# Altium PCB landslide_node.PcbDoc
Units mm, origin at the board's own origin, x right, y up, seen from the top; angles counter-clockwise.
Board outline 91.4 x 86.1 mm, 2 copper layers (Top Layer, Bottom Layer); 58 components, 38 nets, 192 pads, 49 vias.
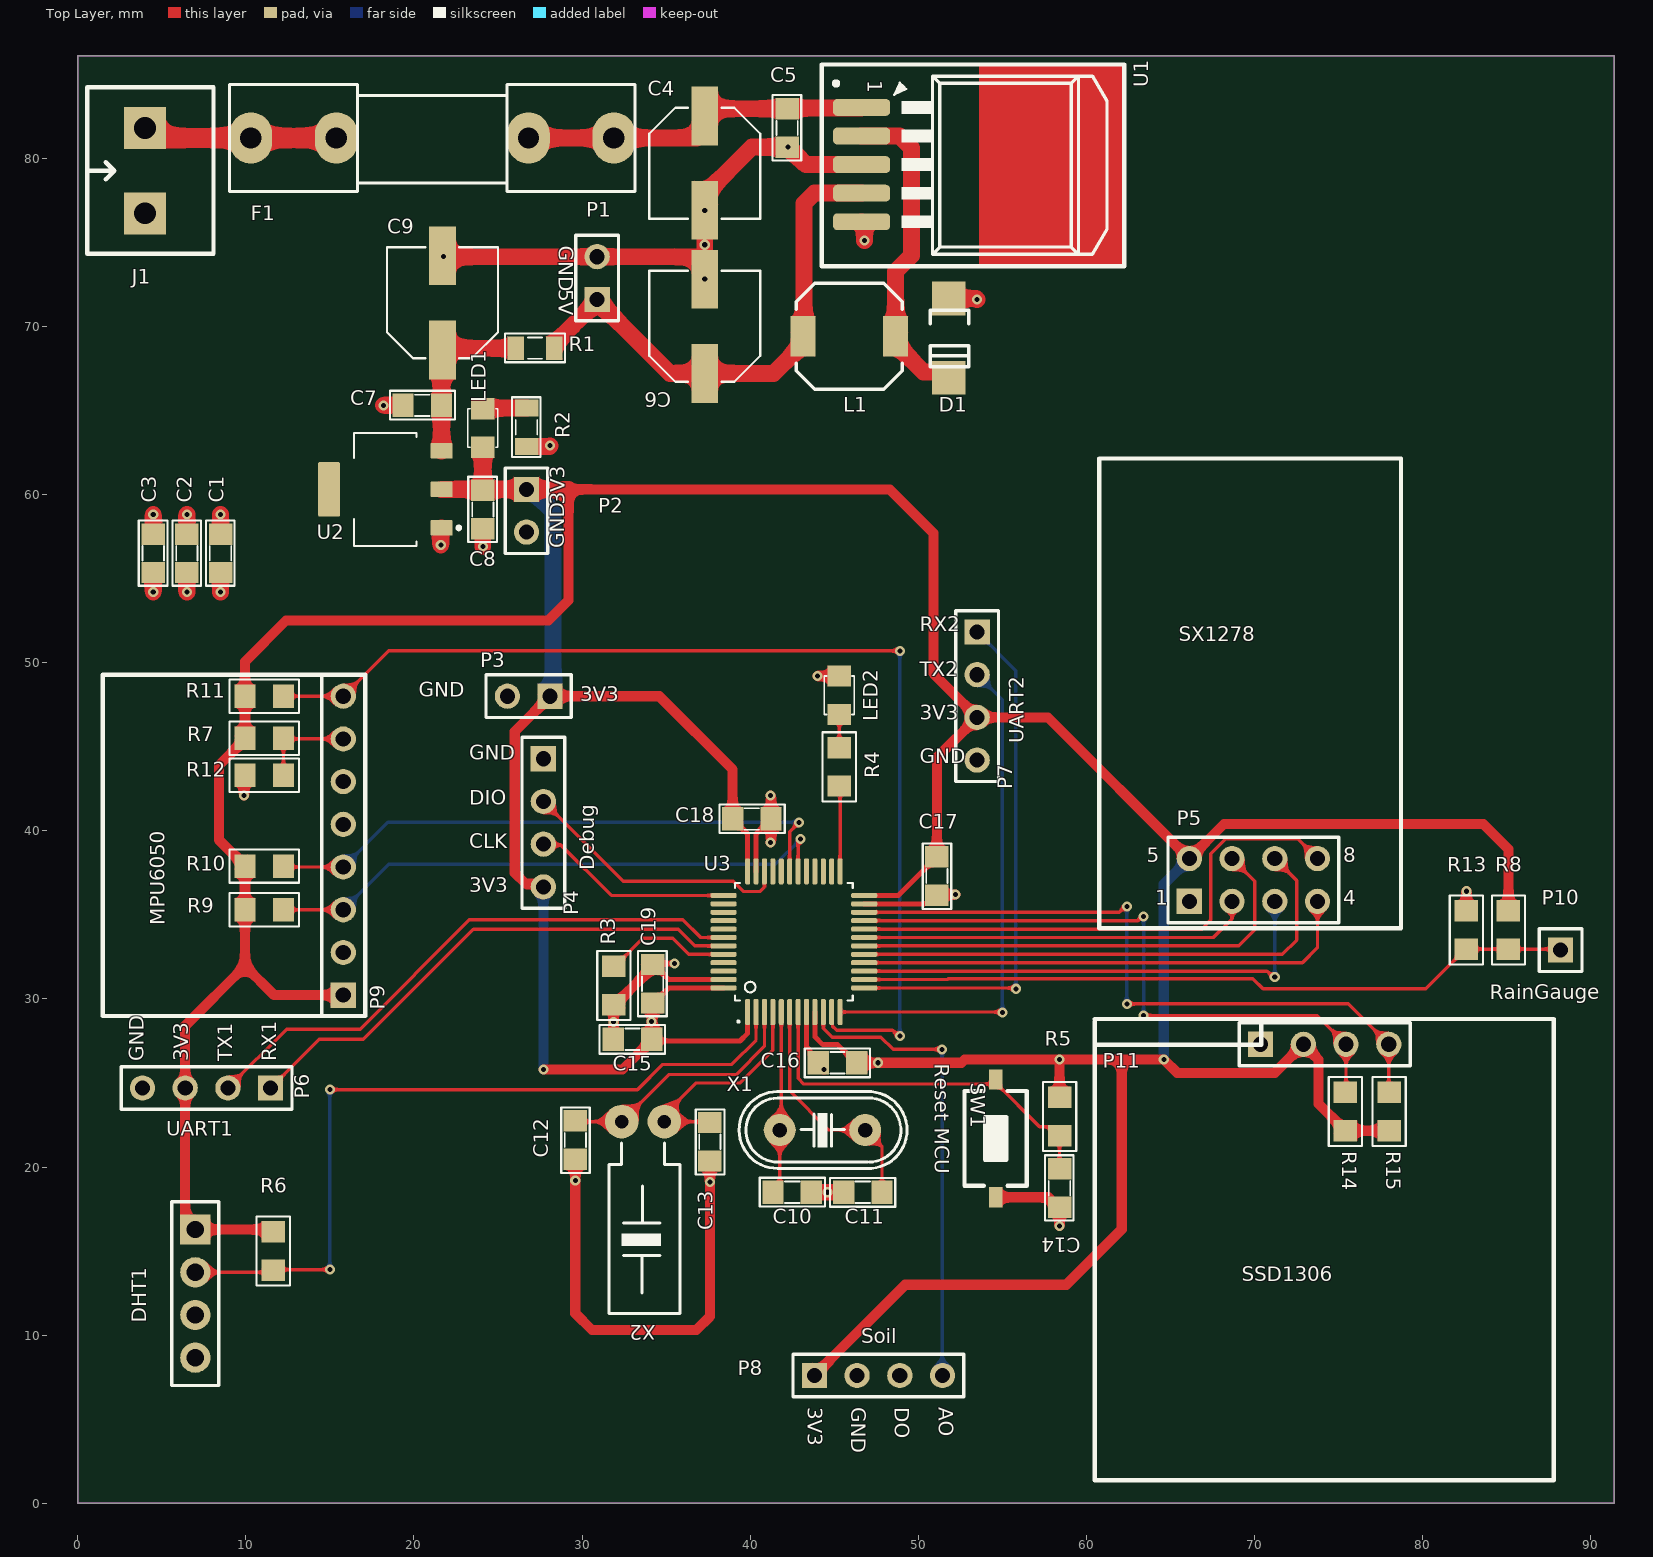
[diagram p0: Top Layer view]
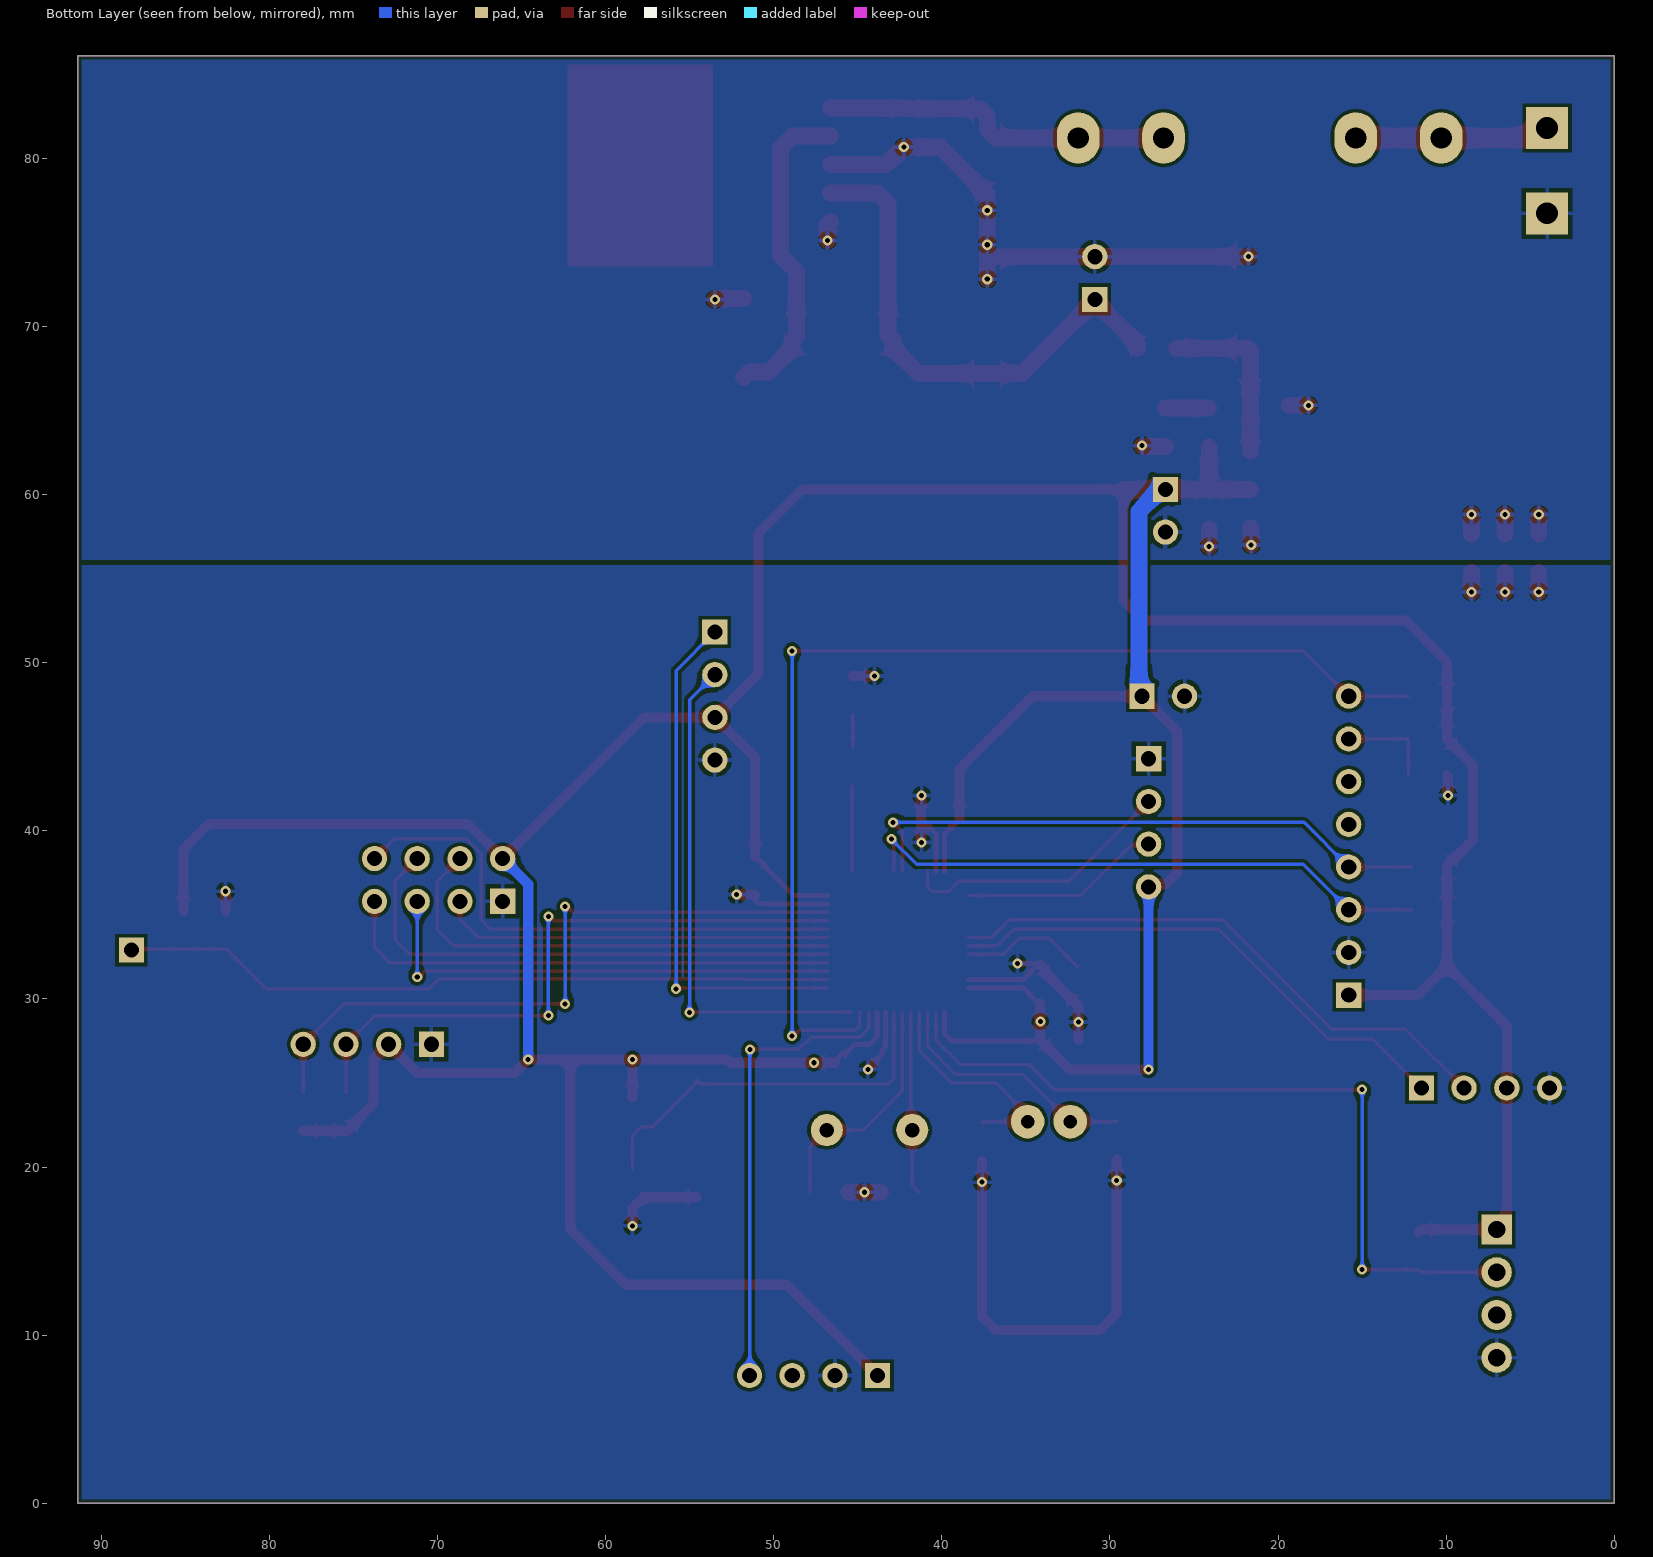
[diagram p1: Bottom Layer view, seen from below]
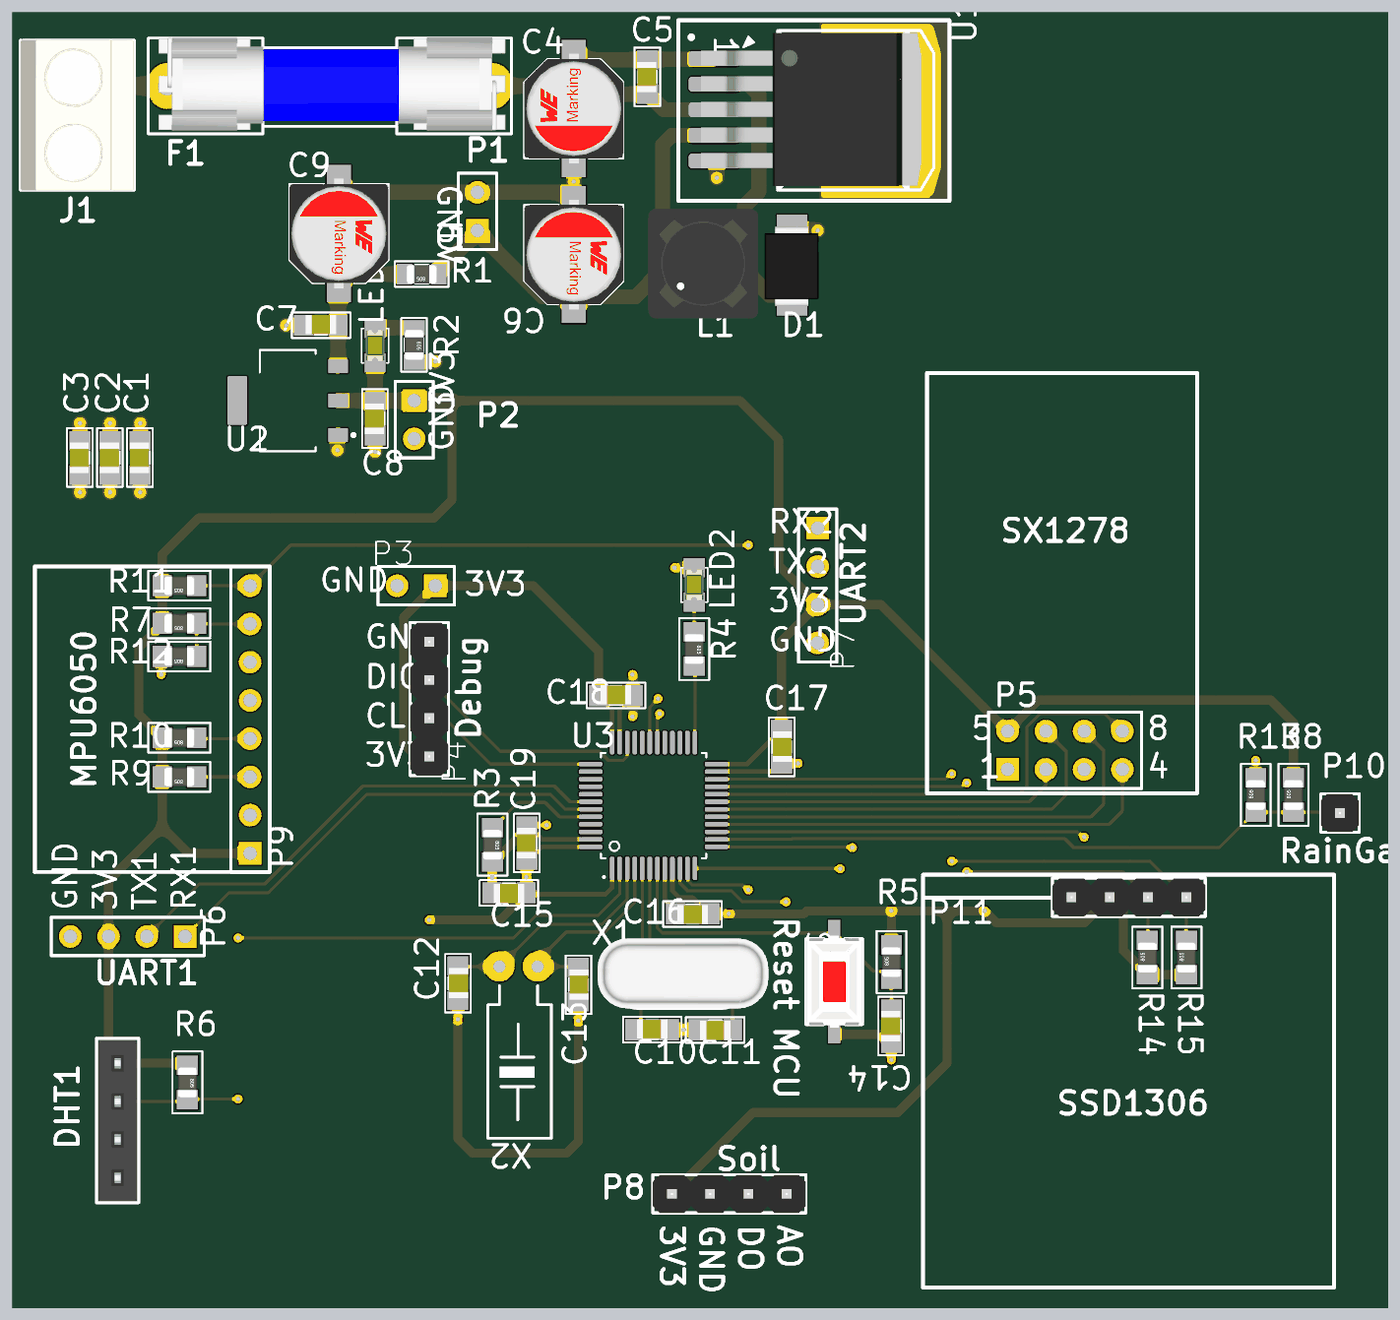
[diagram p2: 3D render of the assembled board from above, using the file's embedded part models]

## Layer stack, top to bottom
Top Solder: solder mask 0.0102, Solder Resist, Dk 3.5
Top Layer: signal copper 0.0356
Dielectric 1: dielectric 0.32, FR-4, Dk 4.8
Bottom Layer: signal copper 0.0356
Bottom Solder: solder mask 0.0102, Solder Resist, Dk 3.5

## Board outline
0,0 0,86.1 91.4,86.1 91.4,0

## Design rules (kind name [scope] priority, off if disabled: settings)
AssemblyTestPointUsage [All] p1 off:
AssemblyTestpoint [All] p1 off: testpointundercomponent=TRUE minsize=1.016 maxsize=2.54 preferedsize=1.524 minholesize=0 maxholesize=1.016 preferedholesize=0.813 testpointgrid=0.025 usegrid=TRUE gridtolerance=0 allowsidetop=TRUE allowsidebottom=TRUE
Clearance [All] p1: gap=0.2 ignorepadtopadclearanceinfootprint=FALSE except(0: Arc-Hole Track-Hole SMDPad-Hole THPad-Hole Via-Hole Fill-Hole Poly-Hole Region-Hole Text-Hole; 0.3: Fill-Fill Fill-Poly Fill-Region Poly-Poly Poly-Region Region-Region)
FabricationTestPointUsage [All] p1 off: valid=0 allowmultiple=FALSE
FabricationTestpoint [All] p1 off: side=3 testpointundercomponent=TRUE minsize=1.016 maxsize=2.54 preferedsize=1.524 minholesize=0 maxholesize=1.016 preferedholesize=0.813 testpointgrid=0.025 allowsidetop=TRUE allowsidebottom=TRUE usegrid=TRUE gridtolerance=0
MinimumSolderMaskSliver [All] p1: minsoldermaskwidth=0
PolygonConnect [All] p1: connectstyle=Relief reliefconductorwidth=0.254 reliefentries=4 polygonreliefangle="90 Angle" airgapwidth=0.254
RoutingVias [All] p1: holewidth=0.3 width=0.6 viastyle="Through Hole" minholewidth=0.3 minwidth=0.6 maxholewidth=0.3 maxwidth=0.6
SilkToSilkClearance [All] p1: silktosilkclearance=0
SilkToSolderMaskClearance [IsPad] p1: minsilkscreentomaskgap=0 clearancetoexposedcopper=TRUE
SolderMaskExpansion [All] p1: expansion=0.102 istentingtop=FALSE
Width [All] p1: maxlimit=3 minlimit=0.2 preferedwidth=0.3
23 further rules are at their usual default settings.

## Classes and differential pairs
net class POWER: +3V3 +5 GND GND_MCU NetC7_1 NetD1_2 NetF1_1 Vin
component class power_node: C1 C2 C3 C4 C5 C6 C7 C8 C9 D1 F1 J1 L1 LED1 P1 P2 R1 R2 U1 U2
component class mcu_node: C10 C11 C12 C13 C14 C15 C16 C17 C18 C19 DHT1 LED2 P3 P4 P5 P6 P7 P8 P9 P10 P11 R3 R4 R5 R6 R7 R8 R9 R10 R11 R12 R13 R14 R15 SW1 U3 X1 X2

## Components (designator, comment, footprint, x,y, rotation, side; value= is the part's Value field where it differs from the comment)
C1 "104" SM-0805 8.5,56.5 r270 top value=103
C2 "104" SM-0805 6.5,56.5 r270 top value=103
C3 "104" SM-0805 4.5,56.5 r270 top value=103
C4 "100uH/25V" CAP-ALU-SMD-6.3x7.7x2.2 37.3,79.7 r270 top
C5 "104" SM-0805 42.2,81.8 r270 top value=103
C6 "470uf/16V" CAP-ALU-SMD-6.3x7.7x2.2 37.3,70 r90 top
C7 "103" SM-0805 20.5,65.3 r180 top
C8 "103" SM-0805 24.1,59.1 r270 top
C9 "100uH/16V" CAP-ALU-SMD-6.3x7.7x2.2 21.7,71.4 r90 top
C10 "22pF" SM-0805 42.5,18.5 r180 top value=103
C11 "22pF" SM-0805 46.7,18.5 r0 top value=103
C12 "22pF" SM-0805 29.6,21.6 r90 top value=103
C13 "22pF" SM-0805 37.6,21.5 r90 top value=103
C14 "104" SM-0805 58.4,18.743 r270 top value=103
C15 "104" SM-0805 33,27.6 r0 top value=103
C16 "104" SM-0805 45.2,26.2 r0 top value=103
C17 "475" SM-0805 51.1,37.3 r90 top value=103
C18 "103" SM-0805 40.1,40.7 r180 top
C19 "105" SM-0805 34.2,30.9 r270 top value=103
D1 "1N5822" Diode_SS34 51.8,69.3 r270 top
DHT1 "DHT22" DHT22 7,12.47 r270 top
F1 "F2A" FUSE2 21.1,81.2 r0 top value=Fuse
J1 "KF2" KF2-5.08 4,79.26 r90 top
L1 "Inductor" inductor_smd 45.9,69.4 r180 top value=100uH
LED1 "LED" LED-0805-Green 24.1,62.814 r90 top value="LED 3 - 5 ly 2 Colour"
LED2 "LED" LED-0805-Green 45.3,46.914 r90 top value="LED 3 - 5 ly 2 Colour"
P1 "Header 2" HDR1X2 30.9,71.6 r90 top
P2 "Header 2" HDR1X2 26.7,60.3 r270 top
P3 "Header 2" HDR1X2 28.1,48 r180 top
P4 "Header 4" "HDR 1X4" 27.7,44.28 r270 top
P5 "LORA_SX1278" HDR2X4_CEN 66.12,35.8 r0 top
P6 "Header 4" HDR1X4 11.48,24.7 r180 top
P7 "Header 4" HDR1X4 53.5,51.82 r270 top
P8 "soil_moisture_ss" "HDR 1X4" 43.82,7.6 r0 top
P9 "Header 8" HDR1X8 15.8,30.22 r90 top
P10 "RainGauge_ss" "HDR 1X1" 88.2,32.9 r180 top
P11 "SSD1306" "HDR 1X4" 70.36,27.3 r0 top
R1 "0R" RES-SMD-0805 27.2,68.7 r180 top
R2 "100R" RES-SMD-0805 26.7,64 r270 top
R3 "4k7" R-0805 31.9,30.8 r270 top value=1k
R4 "47R" R-0805 45.3,43.8 r270 top value=1k
R5 "4k7" R-0805 58.4,23 r90 top value=1k
R6 "4k7" R-0805 11.639,15.004 r270 top value=1k
R7 "4k7" R-0805 11.1,45.5 r180 top value=1k
R8 "4k7" R-0805 85.1,34.1 r90 top value=1k
R9 "4k7" R-0805 11.1,35.3 r180 top value=1k
R10 "4k7" R-0805 11.1,37.9 r180 top value=1k
R11 "4k7" R-0805 11.1,48 r180 top value=1k
R12 "4k7" R-0805 11.1,43.3 r180 top value=1k
R13 "4k7" R-0805 82.6,34.1 r90 top value=1k
R14 "4k7" R-0805 75.4,23.3 r90 top value=1k
R15 "4k7" R-0805 78,23.3 r90 top value=1k
SW1 "SW" SW1-SMD 54.6,21.7 r270 top value="SW chip 2 pin"
U1 "LM2576" TO263 52.6,80 r270 top
U2 "AMS1117-3.3" SOT229P700X180-4N 18.3,60.3 r90 top
U3 "STM32F030CCT6" QFP50P900X900X160-48N 42.6,33.4 r90 top
X1 "8Mhz" XT2 44.3,22.2 r180 top value=4Mhz
X2 "32,768 Khz" XT32k 34.9,22.7 r270 top value=32,768khz

## Footprints (in the part's own frame and the unit in brackets; to place one, negate y for a bottom-side part, rotate by r counter-clockwise, add the part's x,y. Pads: shape width x height; smd on the part's side, far side on the other; paste and mask are expansions set on the pad)
CAP-ALU-SMD-6.3x7.7x2.2 [mm]
  rect 3.5x1.6 smd: 1(-2.8,0) 2(2.8,0)
  silkscreen extent -3.3,-3.3 3.3,3.3, body extent -3.65,-3.3 3.65,3.3, height 7.65
DHT22 [mm]
  rect 1.8x1.8 hole 1.02: 1(-3.81,0)
  round 1.8 hole 1.02: 2(-1.27,0) 3(1.27,0) 4(3.81,0)
  silkscreen extent -5.46,-1.4 5.46,1.4, body extent -7.86,-5.84 7.61,2.31, height 35.57
Diode_SS34 [mm]
  rect 2x2 smd: 1(-2.35,0) 2(2.35,0)
  silkscreen extent -1.65,-1.1 1.7,1.2, body extent -2.57,-1.82 2.73,1.78, height 2.4
FUSE2 [mil] "De Fuse"
  oval 100x120 hole 50: 1(-425,0) 1(-225,0) 2(225,0) 2(425,0)
  silkscreen extent -475,-125 475,125, body extent -448,-117 459,127, height 378
HDR1X2 [mm] "Connector; Header; 2 Position"
  rect 1.5x1.5 hole 0.9: 1(0,0)
  round 1.5 hole 0.9: 2(2.54,0)
  silkscreen extent -1.27,-1.27 3.81,1.27, body extent -1.27,-1.27 3.81,1.27, height 7
HDR1X4 [mm] "Connector; Header; 4 Position"
  rect 1.5x1.5 hole 0.9: 1(0,0)
  round 1.5 hole 0.9: 2(2.54,0) 3(5.08,0) 4(7.62,0)
  silkscreen extent -1.27,-1.27 8.89,1.27, body extent -1.27,-1.27 8.89,1.27, height 7
HDR1X8 [mm] "Connector; Header; 8 Position"
  rect 1.5x1.5 hole 0.9: 1(0,0)
  round 1.5 hole 0.9: 2(2.54,0) 3(5.08,0) 4(7.62,0) 5(10.16,0) 6(12.7,0) 7(15.24,0) 8(17.78,0)
  silkscreen extent -1.27,-1.27 19.05,1.27, body extent -1.27,-1.27 19.05,1.27, height 7
HDR2X4_CEN [mm] "Connector; Header; 4x2 Position"
  rect 1.5x1.5 hole 0.9: 1(0,0)
  round 1.5 hole 0.9: 2(2.54,0) 3(5.08,0) 4(7.62,0) 5(0,2.54) 6(2.54,2.54) 7(5.08,2.54) 8(7.62,2.54)
  silkscreen extent -1.27,-1.27 8.89,3.81, body extent -1.27,-1.27 8.89,3.81, height 7
"HDR 1X1" [mm] "Generic Antenna; 1 Lead"
  rect 1.5x1.5 hole 0.9: 1(0,0)
  silkscreen extent -1.27,-1.27 1.27,1.27, body extent -1.26,-1.27 1.27,1.26, height 8.51
"HDR 1X4" [mm] "Connector; Header; 4 Position"
  rect 1.5x1.5 hole 0.9: 1(0,0)
  round 1.5 hole 0.9: 2(2.54,0) 3(5.08,0) 4(7.62,0)
  silkscreen extent -1.27,-1.27 8.89,1.27, body extent -1.26,-1.27 8.89,1.26, height 8.51
inductor_smd [mm] "SM Inductor; 2 Leads; Body 6.3x6.3mm (LxW)"
  rect 1.5x2.4 smd: 1(-2.75,0) 2(2.75,0)
  silkscreen extent -3.15,-3.15 3.15,3.15, body extent -3.65,-3.65 3.65,3.65, height 4
KF2-5.08 [mm]
  rect 2.5x2.5 hole 1.3: 1(-2.54,0) 2(2.54,0)
  silkscreen extent -4.95,-4.08 4.95,3.43, body extent -5,-4.07 5,3.43, height 10
LED-0805-Green [mil]
  rect 50x55 smd: 1(0,0) 2(90,0)
  silkscreen extent 0,-35 90,35, body extent 5,-25 85,25, height 43
QFP50P900X900X160-48N [mm]
  rrect70% 1.56x0.3 smd: 1(-4.18,2.75) 2(-4.18,2.25) 3(-4.18,1.75) 4(-4.18,1.25) 5(-4.18,0.75) 6(-4.18,0.25) 7(-4.18,-0.25) 8(-4.18,-0.75) 9(-4.18,-1.25) 10(-4.18,-1.75) 11(-4.18,-2.25) 12(-4.18,-2.75) 25(4.18,-2.75) 26(4.18,-2.25) 27(4.18,-1.75) 28(4.18,-1.25) 29(4.18,-0.75) 30(4.18,-0.25) 31(4.18,0.25) 32(4.18,0.75) 33(4.18,1.25) 34(4.18,1.75) 35(4.18,2.25) 36(4.18,2.75)
  rrect70% 0.3x1.56 smd: 13(-2.75,-4.18) 14(-2.25,-4.18) 15(-1.75,-4.18) 16(-1.25,-4.18) 17(-0.75,-4.18) 18(-0.25,-4.18) 19(0.25,-4.18) 20(0.75,-4.18) 21(1.25,-4.18) 22(1.75,-4.18) 23(2.25,-4.18) 24(2.75,-4.18) 37(2.75,4.18) 38(2.25,4.18) 39(1.75,4.18) 40(1.25,4.18) 41(0.75,4.18) 42(0.25,4.18) 43(-0.25,4.18) 44(-0.75,4.18) 45(-1.25,4.18) 46(-1.75,4.18) 47(-2.25,4.18) 48(-2.75,4.18)
  silkscreen extent -4.81,-3.5 3.5,3.5
R-0805 [mil] "Compoment SMD 80x50mil"
  rect 50x55 smd: 1(-45,0) 2(45,0)
  silkscreen extent -81,-39 81,39, body extent -39,-25 39,25, height 31
RES-SMD-0805 [mil]
  rect 39.37x55 smd: 1(-45,0) 2(45,0)
  silkscreen extent -70,-34 70,33, body extent -39,-25 39,25, height 31
SM-0805 [mil] "Compoment SMD 80x50mil"
  rect 50x55 smd: 1(-45,0) 2(45,0)
  silkscreen extent -77,-34 76,33, body extent -40,-27 40,23, height 24
SOT229P700X180-4N [mm]
  rrect15% 0.93x1.31 smd: 1(-2.29,-3.345) 2(0,-3.345) 3(2.29,-3.345)
  rrect15% 3.24x1.31 smd: 4(0,3.345)
  silkscreen extent -3.36,-4.47 3.36,1.86
SW1-SMD [mm]
  rect 1.2x0.8 smd: 1(-3.5,0) 2(3.5,0)
  silkscreen extent -2.82,-1.85 2.82,1.85, body extent -3.05,-1.85 3.05,1.85, height 2.5
TO263 [mm]
  rrect50% 1x3.4 smd: 1(-3.019,-5.969) 2(-1.319,-5.969) 4(2.081,-5.969) 5(3.781,-5.969)
  rrect50% 1x3.4 smd mask+0: 3(0.381,-5.969)
  Top Layer region: -5.568,1.016 6.432,1.016 6.432,9.65 -5.568,9.65
  silkscreen extent -5.57,-8.35 6.43,9.65, body extent -4.73,-6.84 5.43,7.8, height 4.57
XT2 [mil] "Footpin for Crystal 2 pin"
  round 75 hole 34: 1(-100,0) 2(100,0)
  silkscreen extent -198,-90 195,90, body extent -233,-93 213,90, height 138
XT32k [mm] "Crystal 32k, 2 pin, real timer for DS1307"
  round 2 hole 0.813: 1(0,0) 2(0,-2.54)
  silkscreen extent 1.27,-3.3 11.4,0.91

## Part data
C1 C2 C3 C5 C7 C8 C10 C11 C12 C13 C14 C15 C16 C17 C18 C19: library part CM, "Cap SMD"
C4 C6 C9: library part CN-ALU-SMD, "Polarized Capacitor (Axial)", LatestRevisionDate=17-Jul-2002, LatestRevisionNote="Re-released for DXP Platform.", PackageReference=POLAR0.8, Published=8-Jun-2000, Publisher="Altium Limited"
D1: library part 1N5819, "Schottky diode"
DHT1: Manufacturer="W¨¹rth Elektronik eiSos GmbH", partNo=613004143121, ComponentLink1 Description=Manufacturer, ComponentLink1URL=http://www.we-online.com, ComponentLink2 Description=Datasheet, ComponentLink2URL=http://katalog.we-online.de/em/datasheet/6130xx143121.pdf, Created by="Karrer Zheng", Created Date="29 March 2013", NoPins=04
F1: library part Fuse, "Fuse", Designed by=VanDungEvn
J1: Manufacturer="Würth Elektronik eiSos GmbH", partNo=691103110002, ComponentLink1 Description=Manufacturer, ComponentLink1URL=http://www.we-online.com, ComponentLink2 Description=Datasheet, ComponentLink2URL=http://katalog.we-online.de/em/datasheet/6911031100xx.pdf, Created by="Karrer Zheng", Created Date="29 October 2013", NoPins=2
LED1 LED2: library part "LED SMD"
P1 P2 P3: "Header, 2-Pin", LatestRevisionDate=17-Jul-2002, LatestRevisionNote="Re-released for DXP Platform.", Publisher="Altium Limited"
P4 P6 P7: "Header, 4-Pin"
  P6 P7: LatestRevisionDate=17-Jul-2002, LatestRevisionNote="Re-released for DXP Platform.", Publisher="Altium Limited"
P5: library part "Header 4X2A", "Header, 4-Pin, Dual row", LatestRevisionDate=17-Jul-2002, LatestRevisionNote="Re-released for DXP Platform.", Publisher="Altium Limited"
P8 P11: library part "Header 4", "Header, 4-Pin"
P9: "Header, 8-Pin", LatestRevisionDate=17-Jul-2002, LatestRevisionNote="Re-released for DXP Platform.", Publisher="Altium Limited"
P10: library part "Header 1", "Header, 1-Pin"
R1 R2: library part Res-SMD, "Resistor", Manufacturer="Generic Components", Class=Passive, Published=08/06/2000, Publisher="Altium Hobart Technology Centre"
R3 R4 R5 R6 R7 R8 R9 R10 R11 R12 R13 R14 R15: library part resistor, "dien tro"
SW1: library part SW2, "Switch button 2 pin"
U1: Max Input Voltage="12 V", Max Output Current="3 (6.0 peak) A", Max Output Voltage=mV, Temperature Range="-40 to +125 degC", Category=IC-Power, Min Input Voltage=mV, Min Output Voltage=mV, Mounting Technology="Surface Mount", Status=Unreleased, Supply Voltage=mV
U2: "Sot223/Pkg 1-Amp 3.3-Volt Low Drop Out Voltage Regulatator", Package=None, Availability=Unavailable, MF="Advanced Monolithic Systems", MP=AMS1117-3.3, Price=None, SnapEDA_Link=https://www.snapeda.com/parts/AMS1117-3.3/Advanced%20Monolithic%20Systems/view-part/53450/?ref=snap
U3: "ARMÂ® CortexÂ®-M0 STM32F0 Microcontroller IC 32-Bit 48MHz 256KB _256K x 8_ FLASH 48-LQFP _7x7_", Package="LQFP-48 STMicroelectronics", Digi-Key_Part_Number=497-17332-2-ND, Digi-Key_Purchase_URL=https://www.digikey.com.ar/product-detail/en/stmicroelectronics/STM32F030CCT6TR/497-17332-2-ND/6833532?utm_source=snapeda&utm_medium=aggregator&utm_campaign=symbol, MF=STMicroelectronics, MP=STM32F030CCT6, SnapEDA_Link=https://www.snapeda.com/parts/STM32F030CCT6/STMicroelectronics/view-part/447161/?ref=snap
X1: library part XT2, "Crystal For all Crystal 2pin."
X2: library part XT32k, "Crystal 32,768kHz for timer real"
L1: Published=8-Jun-2000, Publisher="Altium Limited", Revision="July-2002: Re-released for DXP Platform."

## Via types
v1: diameter 0.6, hole 0.3, Top Layer to Bottom Layer, 49 vias

## Nets (pads, with @x,y where several pads share a name; then routed paths per layer and width w, separated by ;. In a path a pad name is that pad's centre, name@x,y a point inside that pad or via, vN(x,y) a via of type N, cw(c..) or ccw(c..) an arc to the next point about the centre after c; other vN are vias at no path point)
+3V3: C8.1 C15.2 C16.2 C17.2 C18.2 C19.2 DHT1.1 LED1.1 P2.1 P3.1 P4.4 P5.5 P6.3 P7.3 P8.1 P9.1 P11.2 R5.2 R6.1 R7.2 R8.2 R9.2 R10.2 R11.2 R14.1 R15.1 U2.2 U3.1 U3.9 U3.24 U3.36 U3.48 | length 342.9
  Top Layer w0.3: U3.48 35.157,30.65 34.264,29.757 C19.2 34.172,29.729 34.143,29.7 v1(34.143,28.65) C15.2 34.243,27.5 39.4,27.5 39.85,27.95 U3.1 ; C18.2 38.957,40.636 39.442,40.151 39.506,40.151 39.85,39.807 U3.36 ; U3.9 43.85,27.746 44.321,27.275 45.203,27.275 45.729,26.749 45.911,26.749 C16.2@46.243,26.416 ; U3.24 48.807,36.15 50.551,37.894 50.551,37.958 51.036,38.443 C17.2
  Top Layer w0.4: C8.1@24.043,60.3 C8.1 C8.1@24.157,60.3
  Top Layer w0.6: R6.1 11.507,16.28 DHT1.1 6.4,16.88 P6.3 6.4,28.4 9.957,31.957 ; P9.1 11.694,30.22 9.957,31.957 ; v1(27.7,25.8) 32.406,25.8 34.143,27.537 C15.2 34.172,27.629 C19.2@34.172,29.729 ; P4.4 27.528,36.832 26.668,36.832 26,37.5 26,45.9 P3.1 34.6,48 38.957,43.643 C18.2 ; P8.1 49.22,13 58.8,13 62.1,16.3 62.1,26.4 ; C16.2 52.564,26.2 52.764,26.4 v1(58.4,26.4) ; C17.2 51.1,44.34 P7.3 ; R5.2 v1(58.4,26.4) ; R15.1 75.337,22.157 75.002,22.492 75.002,22.556 73.8,23.757 73.8,26.4 P11.2 71.2,25.6 65.4,25.6 v1(64.6,26.4) 62.1,26.4 ; R8.2 85.1,38.9 83.6,40.4 68.18,40.4 P5.5 57.72,46.74 P7.3 ; 9.957,31.957 R9.2 R10.2 9.957,37.964 9.622,38.299 9.559,38.299 8.4,39.457 8.4,43.88 9.957,45.437 R7.2 R11.2 9.957,50.057 12.4,52.5 28,52.5 29.2,53.7 29.2,60.3 48.3,60.3 50.9,57.7 50.9,49.34 P7.3 ; v1(58.4,26.4) 62.1,26.4
  Top Layer w1: U2.2 C8.1@24.043,60.3 ; C8.1 LED1.1 ; C8.1@24.157,60.3 P2.1 29.2,60.3
  Bottom Layer w0.6: v1(27.7,25.8) P4.4 ; v1(64.6,26.4) 64.6,36.82 P5.5
  Bottom Layer w1: P2.1 26.95,60.05 27.228,60.05 28.28,58.998 28.28,48.18 P3.1
  other v1: 47.6,26.2
+5: C6.1 L1.2 P1.1 R1.1 U1.4 | length 30.7
  Top Layer w1: R1.1 28.343,68.898 28.643,69.199 28.643,69.243 30.65,71.25 30.65,71.35 P1.1 ; P1.1@30.9,71.257 31.243,71.257 31.45,71.05 31.45,70.974 35.224,67.2 C6.1 41.4,67.2 42.9,68.7 42.9,69.15 43.2,69.45 43.2,77.3 43.819,77.919 U1.4
data_DHT22: DHT1.2 R6.2 U3.2 | length 47
  Top Layer w0.2: DHT1.2 11.518,13.74 R6.2 11.678,13.9 v1(15,13.9) ; v1(15,24.6) 33.3,24.6 34.8,26.1 38.9,26.1 40.35,27.55 U3.2
  Bottom Layer w0.2: v1(15,13.9) v1(15,24.6)
GND: C1.1 C2.1 C3.1 C4.2 C5.2 C6.2 C7.2 C8.2 C9.2 D1.1 J1.1 P1.2 P2.2 R2.2 U1.3 U1.5 U2.1 | length 42.7
  Top Layer w1: C3.1 v1(4.5,58.8) ; C2.1 v1(6.5,58.8) ; C1.1 v1(8.5,58.8) ; v1(18.2,65.3) C7.2 ; v1(21.6,57) 21.6,57.965 U2.1 ; C9.2 v1(21.76,74.14) C6.2@37.3,74.14 ; v1(24.1,56.9) C8.2 ; R2.2 28.057,62.857 v1(28.1,62.9) ; v1(37.3,72.8) C6.2@37.3,74.14 ; C5.2 v1(42.263,80.657) ; U1.5 46.8,76.05 v1(46.8,75.1) ; U1.3 43.301,79.619 v1(42.263,80.657) ; D1.1 53.45,71.65 v1(53.5,71.6) ; C6.2@37.3,74.14 v1(37.3,74.85) v1(37.3,76.9) 37.3,77.85 40.107,80.657 v1(42.263,80.657)
GND_MCU: C1.2 C2.2 C3.2 C10.1 C11.1 C12.1 C13.1 C14.2 C15.1 C16.1 C17.1 C18.1 C19.1 DHT1.4 LED2.2 P3.2 P4.1 P5.1 P6.4 P7.4 P8.2 P9.2 P11.1 R3.2 R12.2 R13.2 SW1.2 U3.8 U3.23 U3.35 U3.47 | length 68.5
  Top Layer w0.3: v1(35.5,32.1) 34.257,32.1 C19.1 34.264,32.043 35.157,31.15 U3.47 ; U3.35 40.35,38.236 40.35,39.807 40.695,40.151 40.758,40.151 C18.1@41.243,40.636 ; U3.8 43.35,27.149 43.572,26.927 43.572,26.685 C16.1 ; U3.23 50.35,35.65 50.372,35.672 50.915,35.672 C17.1@51.1,35.857
  Top Layer w0.6: v1(9.9,42.1) 9.9,43.243 R12.2 ; C12.1 v1(29.6,19.2) 29.6,11.3 30.6,10.3 36.8,10.3 37.6,11.1 v1(37.6,19.1) C13.1 ; C15.1 31.879,27.622 v1(31.879,28.629) 31.879,29.636 R3.2 31.963,29.657 33.801,31.495 33.801,31.708 34.137,32.043 C19.1 ; v1(41.2,39.3) 41.243,39.343 41.243,40.636 C18.1 41.243,42.057 v1(41.2,42.1) ; v1(44,49.2) LED2.2 ; C16.1 44.057,26.137 44.392,25.802 v1(44.4,25.8) v1(44.4,25.8) ; C17.1 51.143,36.2 v1(52.2,36.2) ; SW1.2 57.736,18.2 58.336,17.6 C14.2 v1(58.4,16.5) ; R13.2 v1(82.6,36.4)
  Top Layer w1: v1(4.5,54.2) C3.2 ; v1(6.5,54.2) C2.2 ; v1(8.5,54.2) C1.2 ; C10.1 v1(44.6,18.5) C11.1
LORA_DIO0: P5.8 U3.20 | length 32
  Top Layer w0.2: U3.20 66.85,34.15 67.4,34.7 67.4,38.631 68.286,39.517 72.563,39.517 P5.8
LORA_MISO: P5.4 U3.16 | length 30.1
  Top Layer w0.2: U3.16 72.85,32.15 73.74,33.04 P5.4
LORA_MOSI: P5.7 U3.17 | length 31.5
  Top Layer w0.2: U3.17 71.65,32.65 72.5,33.5 72.5,37.04 P5.7
LORA_NSS: P5.6 U3.18 | length 28.4
  Top Layer w0.2: U3.18 69.05,33.15 70,34.1 70,37 P5.6
LORA_RST: P5.2 U3.19 | length 23.4
  Top Layer w0.2: U3.19 67.55,33.65 68.66,34.76 P5.2
LORA_SCK: P5.3 U3.15 | length 29.1
  Top Layer w0.2: U3.15 70.742,31.65 71.092,31.3 v1(71.2,31.3)
  Bottom Layer w0.2: v1(71.2,31.3) P5.3
MCU_RX1: P6.1 U3.43 | length 31.3
  Top Layer w0.2: P6.1 14.38,27.6 17,27.6 23.545,34.145 35.72,34.145 36.715,33.15 U3.43
MCU_RX2: P7.1 U3.13 | length 31.2
  Top Layer w0.2: U3.13 v1@55.8,30.65
  Bottom Layer w0.2: P7.1 55.8,49.52 v1(55.8,30.6)
MCU_TX1: P6.2 U3.42 | length 34.1
  Top Layer w0.2: P6.2 12.44,28.2 16.8,28.2 23.3,34.7 36,34.7 37.05,33.65 U3.42
MCU_TX2: P7.2 U3.12 | length 30.4
  Top Layer w0.2: U3.12 v1@55,29.22
  Bottom Layer w0.2: P7.2 55,47.78 v1(55,29.2)
MPU_INT: P9.8 R11.1 U3.11 | length 65.8
  Top Layer w0.2: R11.1 P9.8 18.5,50.7 v1(48.9,50.7) ; U3.11 44.897,29.173 44.897,28.38 45.153,28.125 48.467,28.125 48.792,27.8 v1(48.9,27.8)
  Bottom Layer w0.2: v1(48.9,27.8) v1(48.9,50.7)
MPU_SCL: P9.3 R9.1 U3.30 | length 34.7
  Top Layer w0.2: R9.1@12.043,35.3 R9.1 P9.3 ; U3.30 42.85,39.242 43,39.392 v1(43,39.5)
  Bottom Layer w0.2: P9.3 18.5,38 41.5,38 v1(43,39.5)
MPU_SDA: P9.4 R10.1 U3.31 | length 35.1
  Top Layer w0.2: R10.1@12.043,37.9 12.103,37.84 P9.4 ; U3.31 42.35,39.95 v1(42.9,40.5)
  Bottom Layer w0.2: P9.4 18.46,40.5 v1(42.9,40.5)
NetC7_1: C7.1 C9.1 R1.2 U2.3 | length 10.4
  Top Layer w1: U2.3 21.645,68.545 C9.1 21.8,68.7 R1.2
NetD1_2: D1.2 L1.1 U1.2 | length 19.3
  Top Layer w1: U1.2 48.881,81.319 49.6,80.6 49.6,74.2 48.65,73.25 L1.1 48.9,69.15 48.9,68.7 50.311,67.289 51.461,67.289 D1.2
NetF1_1: F1.1 J1.2 | length 11.6
  Top Layer w1.2: J1.2 4.6,81.2 10.305,81.2 F1.1@15.385,81.2
NetLED1_2: LED1.2 R2.1 | length 2.6
  Top Layer w0.4: LED1.2 LED1.2@24.143,65.143
  Top Layer w1: LED1.2@24.143,65.143 R2.1
NetLED2_1: LED2.1 R4.1 | length 2
  Top Layer w0.2: R4.1 LED2.1
NetP9_7: P9.7 R7.1 R12.1 | length 5.7
  Top Layer w0.2: R12.1 12.243,45.42 12.283,45.46 P9.7
NetR3_1: R3.1 U3.44 | length 7.6
  Top Layer w0.2: R3.1 31.963,31.943 33.62,33.6 35.4,33.6 36.35,32.65 U3.44
NRST: C14.1 R5.1 SW1.1 U3.7 | length 23.2
  Top Layer w0.2: U3.7 42.85,25.282 43.198,24.935 54.335,24.935 SW1.1 54.6,25 57.208,22.392 57.865,22.392 R5.1 C14.1
OSC32_IN: C12.2 U3.3 X2.2 | length 15.2
  Top Layer w0.2: C12.2 29.643,22.7 X2.2 35.16,25.5 39.172,25.5 40.85,27.178 U3.3
OSC32_OUT: C13.2 U3.4 X2.1 | length 13.4
  Top Layer w0.2: C13.2 37.543,22.7 X2.1 34.9,23.1 36.8,25 39.4,25 41.35,26.95 U3.4
OSC_IN: C10.2 U3.5 X1.2 | length 10.9
  Top Layer w0.2: C10.2 41.76,18.903 X1.2 41.85,22.29 U3.5
OSC_OUT: C11.2 U3.6 X1.1 | length 14.3
  Top Layer w0.2: U3.6 42.35,24.526 44.676,22.2 X1.1 47.843,21.197 C11.2
Rain_pulse: P10.1 R8.1 R13.1 U3.14 | length 42.7
  Top Layer w0.2: U3.14 51.729,31.15 51.779,31.2 69.9,31.2 70.5,30.6 80.179,30.6 82.537,32.957 R13.1 R8.1 88.143,32.957 P10.1
soil_AO: P8.4 U3.10 | length 28
  Top Layer w0.2: U3.10 44.35,28.25 44.875,27.725 47.775,27.725 48.5,27 v1(51.4,27)
  Bottom Layer w0.2: v1(51.4,27) 51.42,26.98 51.42,7.62 P8.4
SSD1306_SCL: P11.3 R14.2 U3.21 | length 38.2
  Top Layer w0.2: U3.21 63.042,34.65 63.292,34.9 v1(63.4,34.9) ; v1(63.4,29) 73.74,29 P11.3 75.44,24.483 R14.2
  Bottom Layer w0.2: v1(63.4,29) v1(63.4,34.9)
SSD1306_SDA: P11.4 R15.2 U3.22 | length 41
  Top Layer w0.2: U3.22 61.942,35.15 62.292,35.5 v1(62.4,35.5) ; v1(62.4,29.7) 75.58,29.7 P11.4 77.98,24.463 R15.2
  Bottom Layer w0.2: v1(62.4,29.7) v1(62.4,35.5)
STM_STATUS: R4.2 U3.25 | length 5.1
  Top Layer w0.2: R4.2 45.35,42.607 U3.25
SWCLK: P4.3 U3.37 | length 12
  Top Layer w0.2: P4.3 27.75,39.15 28.75,39.15 31.75,36.15 U3.37
SWDIO: P4.2 U3.34 | length 16.4
  Top Layer w0.2: P4.2 32.44,37 39,37 39.617,36.383 40.583,36.383 40.85,36.65 U3.34
Vin: C4.1 C5.1 F1.2 U1.1 | length 21
  Top Layer w1: F1.2@26.815,81.2 31.895,81.2 36.8,81.2 37.3,81.7 C4.1 37.743,82.943 C5.1 42.238,82.981 46.593,82.981 U1.1
pads on no net: DHT1.3 P8.3 P9.5 P9.6 U2.4 U3.26 U3.27 U3.28 U3.29 U3.32 U3.33 U3.38 U3.39 U3.40 U3.41 U3.45 U3.46

## Polygon pours and split planes (outlines as drawn)
GND on Bottom Layer "NONET_L-01_P-001" (solid, remove dead copper, pour order 1): 0,86.1 100,86.1 100,-13.9 0,-13.9
GND_MCU on Bottom Layer "NONET_L-01_P-001" (solid, remove dead copper, pour order 0): 0,55.8 100,55.8 100,-13.9 0,-13.9

## Keep-outs
Keep-Out Layer:
  the board outline again, w0.1

## Silkscreen, mask and mechanical layers (free items; w line width, h text height)
Top Overlay:
  lines w0.254: 1.491,28.987 17.091,28.987 ; 1.5,28.98 1.5,49.28 17.1,49.28 17.1,28.98 ; 60.495,28.668 60.495,1.368 87.8,1.368 87.8,28.8 60.495,28.8 ; 60.561,27.276 70.401,27.276 70.401,28.776 ; 60.765,34.2 60.765,62.14 78.711,62.14 78.711,34.2 60.765,34.2
  text "GND" at 28.317,74.8 h1.5 r270
  text "5V" at 28.317,72.2 h1.5 r270
  text "3V3" at 29.283,59.4 h1.5 r90
  text "GND" at 29.23,56.8 h1.5 r90
  text "RX2" at 50.1,51.554 h1.5
  text "SX1278" at 65.5,50.957 h1.5
  text "TX2" at 50.1,48.9 h1.5
  text "GND" at 20.3,47.67 h1.5
  text "3V3" at 29.9,47.417 h1.5
  text "3V3" at 50.1,46.317 h1.5
  text "UART2" at 56.583,45.2 h1.5 r90
  text "GND" at 23.3,43.91 h1.5
  text "GND" at 50.1,43.717 h1.5
  text "DIO" at 23.3,41.257 h1.5
  text "CLK" at 23.3,38.657 h1.5
  text "Debug" at 31.018,37.64 h1.5 r90
  text "3V3" at 23.3,36.057 h1.5
  text "MPU6050" at 5.483,34.38 h1.5 r90
  text "RainGauge" at 84,29.682 h1.5
  text "GND" at 4.23,26.3 h1.5 r90
  text "3V3" at 6.883,26.3 h1.5 r90
  text "TX1" at 9.5,26.3 h1.5 r90
  text "RX1" at 12.1,26.3 h1.5 r90
  text "Reset MCU" at 50.671,26.146 h1.5 r270
  text "UART1" at 5.286,21.563 h1.5
  text "SSD1306" at 69.24,12.917 h1.5
  text "Soil" at 46.6,9.217 h1.5
  text "3V3" at 43.117,5.7 h1.5 r270
  text "GND" at 45.717,5.7 h1.5 r270
  text "DO" at 48.317,5.7 h1.5 r270
  text "AO" at 50.917,5.7 h1.5 r270

## Text inside footprints (layer, text, board x,y; h text height)
P5: Top Overlay "5" at 63.58,37.832 h1.5; Top Overlay "1" at 64.088,35.292 h1.5; Top Overlay "4" at 75.264,35.292 h1.5; Top Overlay "8" at 75.264,37.832 h1.5
U1: Top Overlay "1" at 46.682,84.645 h1.5 r270